# Altium PCB Copy of gimbalPCB.PcbDoc
Units mil, origin at the board's own origin, x right, y up, seen from the top; angles counter-clockwise.
Board outline 6000 x 4000 mil, 2 copper layers (Top Layer, Bottom Layer); 79 components, 41 nets, 0 pads, 0 vias.
Unrouted connection lines stored in the file: 158.
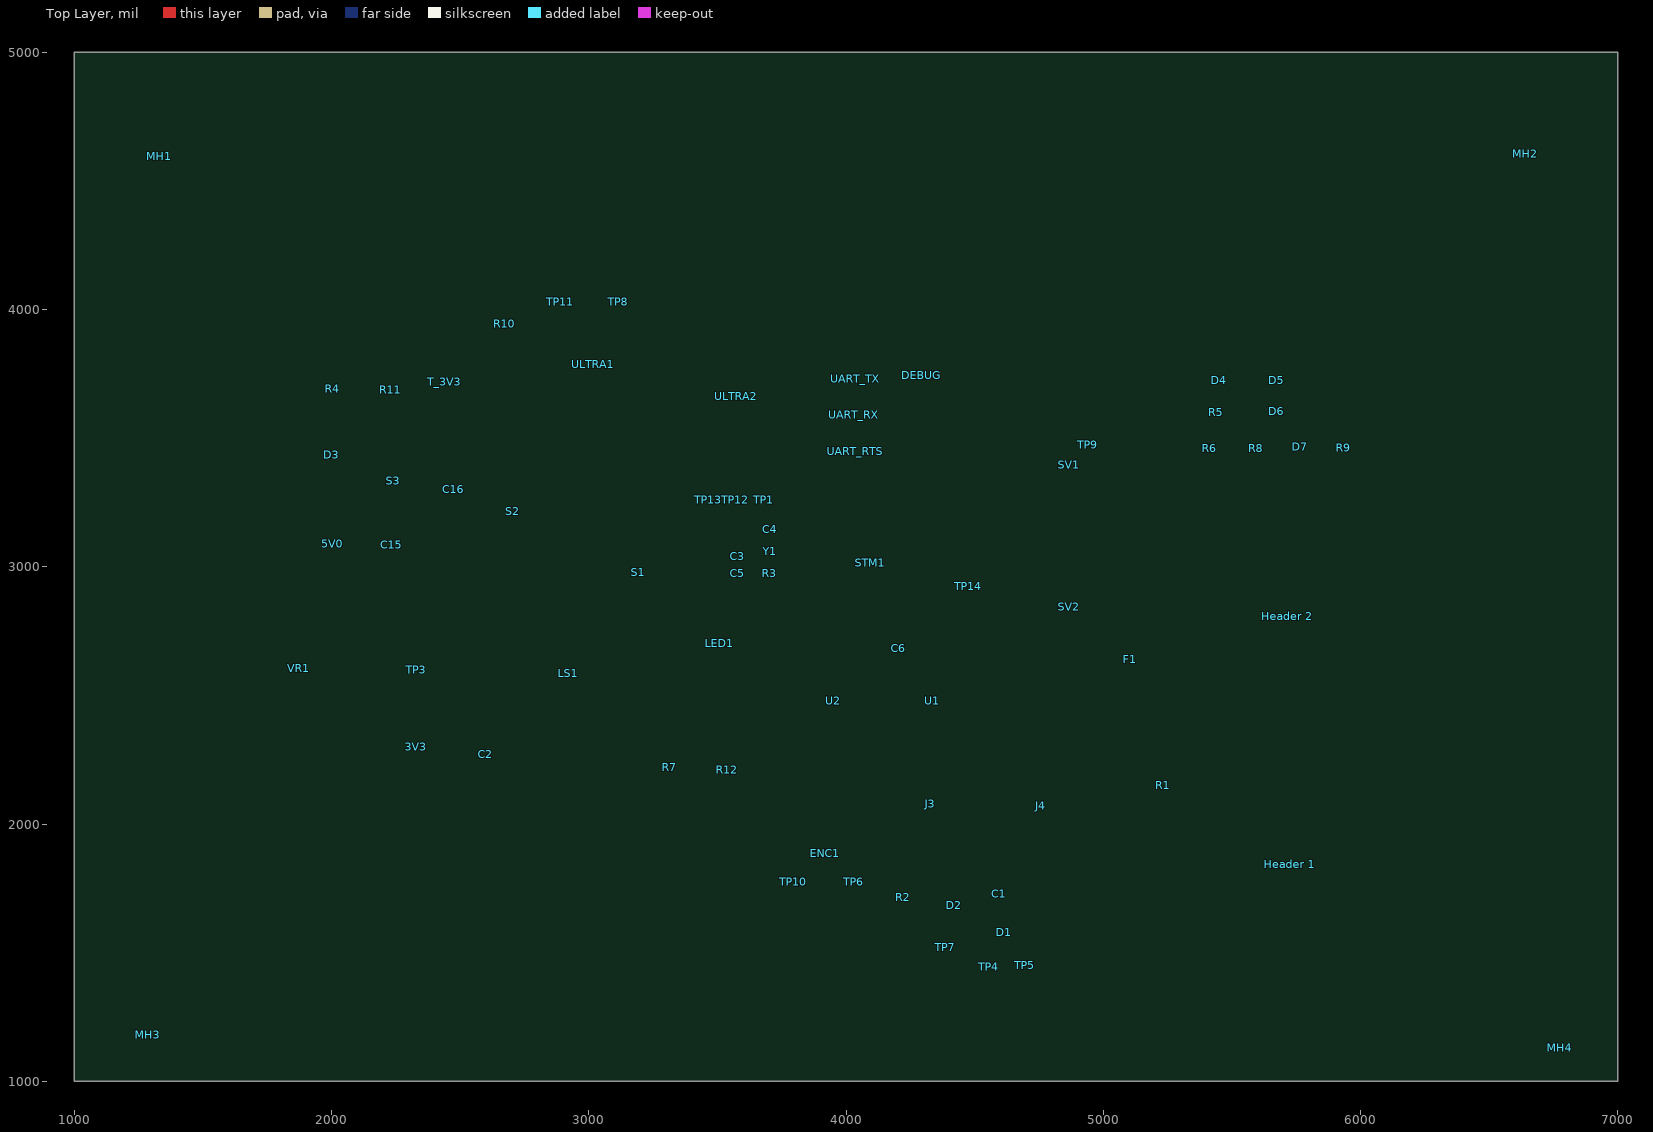
[diagram p0: Top Layer view]
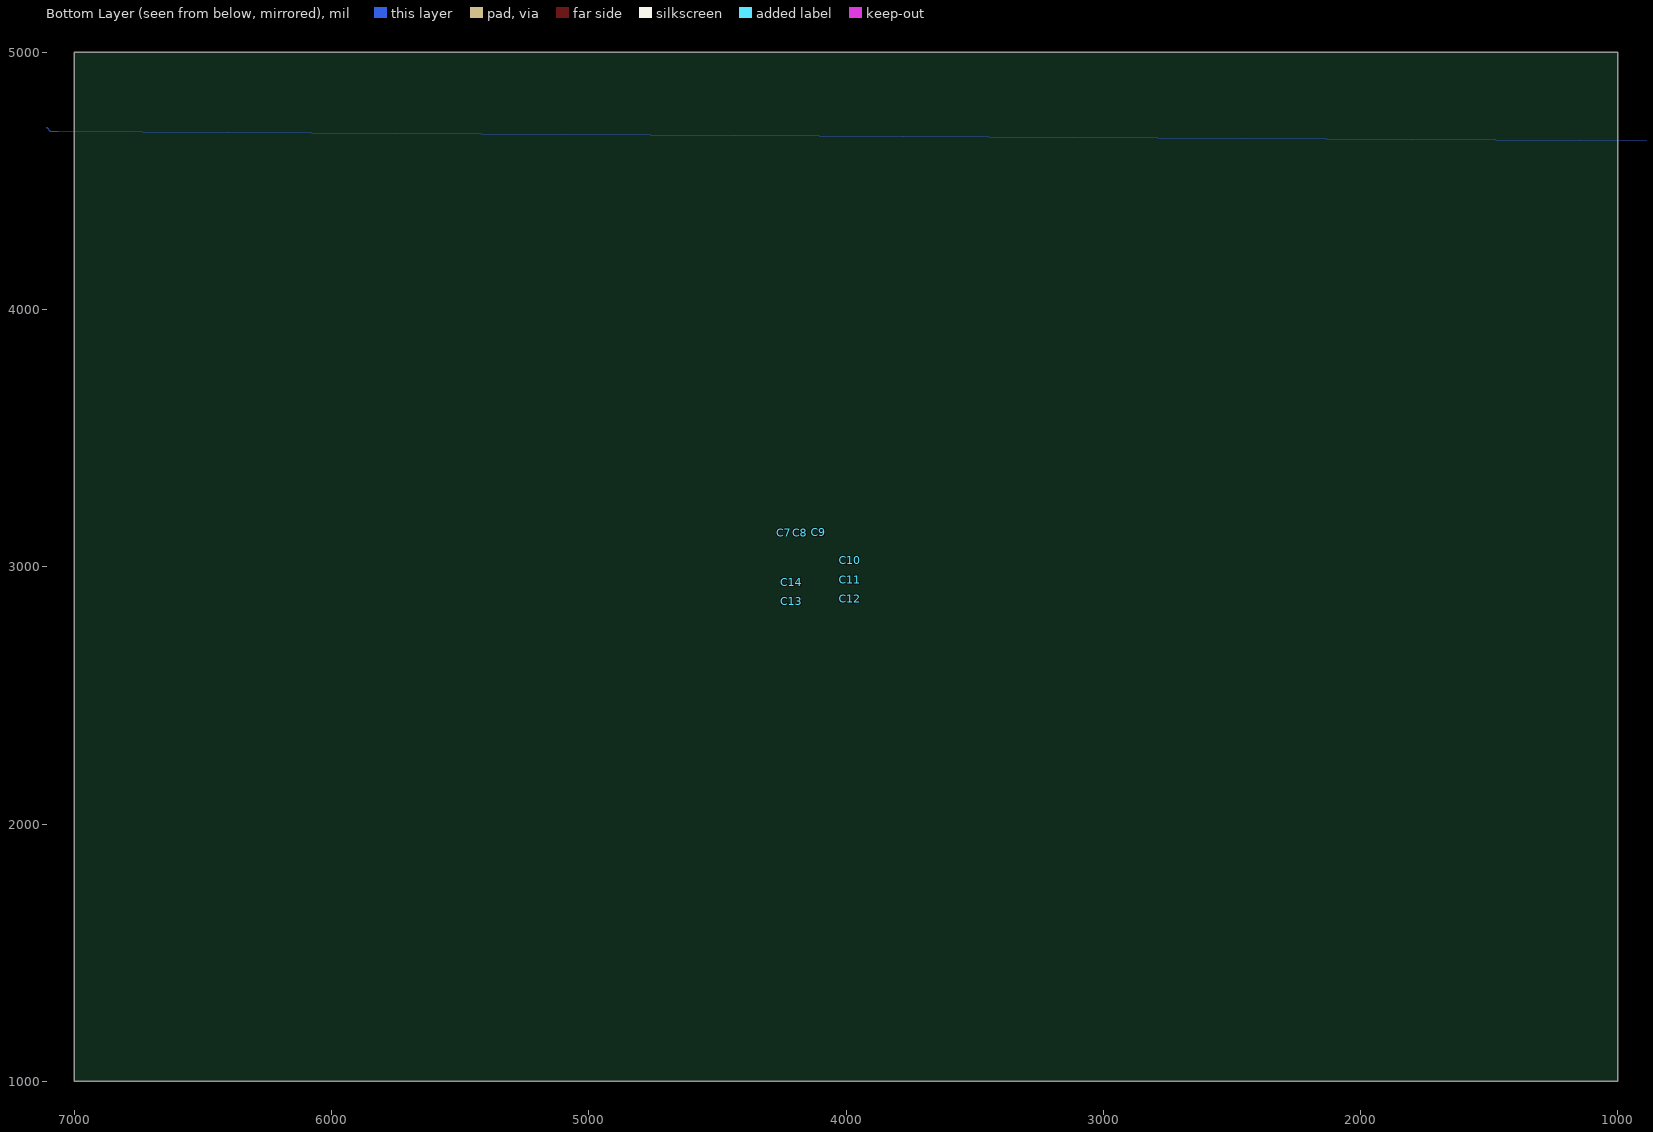
[diagram p1: Bottom Layer view, seen from below]

## Layer stack, top to bottom
Top Solder: solder mask 0.4, Solder Resist, Dk 3.5
Top Layer: signal copper 1.4
Dielectric 1: dielectric 12.6, FR-4, Dk 4.8
Bottom Layer: signal copper 1.4
Bottom Solder: solder mask 0.4, Solder Resist, Dk 3.5

## Board outline
1000,1000 7000,1000 7000,5000 1000,5000

## Design rules (kind name [scope] priority, off if disabled: settings)
BoardOutlineClearance [All] p1: gap=10 ignorepadtopadclearanceinfootprint=FALSE except(0: Arc-SplitContinuation Track-SplitContinuation SMDPad-SplitContinuation THPad-SplitContinuation Via-SplitContinuation Fill-SplitContinuation Poly-SplitContinuation Region-SplitContinuation Text-SplitContinuation)
PolygonConnect [All] p1: connectstyle=Relief reliefconductorwidth=10 reliefentries=4 polygonreliefangle="90 Angle" airgapwidth=10
RoomDefinition Support [InComponentClass('Support')] p1: confinementstyle=ConfineIn formatcopy=TRUE lockcomponents=FALSE outline 0,0 2000,0 2000,1000 0,1000
RoomDefinition POWER [InComponentClass('POWER')] p2: confinementstyle=ConfineIn formatcopy=TRUE lockcomponents=FALSE outline 0,0 2000,0 2000,1000 0,1000
RoomDefinition MCU [InComponentClass('MCU')] p3: confinementstyle=ConfineIn formatcopy=TRUE lockcomponents=FALSE outline 0,0 2000,0 2000,1000 0,1000
RoomDefinition Connectors [InComponentClass('Connectors')] p4: confinementstyle=ConfineIn formatcopy=TRUE lockcomponents=FALSE outline 0,0 2000,0 2000,1000 0,1000
RoomDefinition CAN [InComponentClass('CAN')] p5: confinementstyle=ConfineIn formatcopy=TRUE lockcomponents=FALSE outline 0,0 2000,0 2000,1000 0,1000
RoutingVias [All] p1: holewidth=28 width=50 viastyle="Through Hole" minholewidth=28 minwidth=50 maxholewidth=28 maxwidth=50
SolderMaskExpansion [All] p1: expansion=4
Width "3V3 width" [InNet('+3V3')] p1: maxlimit=20 minlimit=15 preferedwidth=20 minimp=50.000000 maximp=50.000000 favimp=50.000000
Width [All] p2: maxlimit=10 minlimit=6 preferedwidth=10 minimp=50.000000 maximp=50.000000 favimp=50.000000
29 further rules are at their usual default settings.

## Classes and differential pairs
component class Support: D4 D5 D6 D7 MH1 MH2 MH3 MH4 R5 R6 R8 R9 R10 R11 S2 S3 TP8 TP9 TP10 TP11 TP12 TP13 TP14 UART_RTS UART_RX UART_TX
component class POWER: C15 C16 D3 R4 T_3V3 TP1 TP3 VR1
component class MCU: C3 C4 C5 C6 C7 C8 C9 C10 C11 C12 C13 C14 R3 S1 STM1 Y1
component class Connectors: 3V3 5V0 DEBUG ENC1 F1 J3 J4 LED1 LS1 R7 R12 SV1 SV2 ULTRA1 ULTRA2
component class CAN: C1 C2 D1 D2 "Header 1" "Header 2" R1 R2 TP4 TP5 TP6 TP7 U1 U2

## Components (designator, comment, footprint, x,y, rotation, side; value= is the part's Value field where it differs from the comment)
3V3 "" JST-B2B-PHSK 2330,2300 r90 top
5V0 "" JST-B2B-PHSK 2005,3089.37 r90 top
C1 "" CAPC0603(1608)55_N 4595,1728.5 r90 top
C2 "" CAPC0603(1608)55_N 2600,2271.5 r270 top
C3 "" CAPC0603(1608)55_N 3580,3040 r0 top locked
C4 "" CAPC0603(1608)55_N 3705,3145 r0 top locked
C5 "" CAPC0603(1608)55_N 3580,2975 r0 top locked
C6 "" CAPC0603(1608)55_N 4205,2683.5 r90 top
C7 "" CAPC0603(1608)55_N 4240,3131.5 r90 bottom
C8 "" CAPC0603(1608)55_N 4177.5,3131.5 r90 bottom
C9 "" CAPC0603(1608)55_N 4105,3135 r90 bottom
C10 "" CAPC0603(1608)55_N 3983.5,3025 r180 bottom
C11 "" CAPC0603(1608)55_N 3983.5,2950 r180 bottom
C12 "" CAPC0603(1608)55_N 3983.5,2875 r180 bottom
C13 "" CAPC0603(1608)55_N 4211.5,2865 r0 bottom
C14 "" CAPC0603(1608)55_N 4211.5,2940 r0 bottom
C15 "" CAPC0603(1608)55_N 2235,3086.5 r90 top
C16 "" CAPC0603(1608)55_N 2475,3301.5 r270 top
D1 "" NXP-SOT323-3 4615,1578.58 r90 top
D2 "" NXP-SOT323-3 4420,1685 r0 top
D3 "" LED_0805_LINE 2000,3436.34 r270 top
D4 "" LED_0805_LINE 5451.34,3725 r0 top
D5 "" LED_0805_LINE 5675,3725 r0 top
D6 "" LED_0805_LINE 5673.66,3605 r0 top
D7 "" LED_0805_LINE 5765,3466.34 r90 top
DEBUG "" HEADER_2X4 4295,3745 r270 top
ENC1 "" JST-B3B-SM4-TB 3918.54,1886.53 r0 top
F1 "" FUSE 5105,2640 r270 top locked
"Header 1" "" OSTYK51102030 5725,1842.68 r90 top
"Header 2" "" OSTYK51102030 5715,2807.68 r270 top
J3 "" JST-B3B-SM4-TB 4327.99,2078.74 r270 top locked
J4 "" JST-B3B-SM4-TB 4757.99,2070 r270 top locked
LED1 "" JST-B3B-SM4-TB 3508.74,2702.01 r180 top
LS1 "" JST-B2B-SM4-TB 2920.63,2587.01 r180 top
MH1 "" MOUNTING_HOLE 1330,4595 r0 top
MH2 "" MOUNTING_HOLE 6640,4605 r0 top
MH3 "" MOUNTING_HOLE 1285,1180 r0 top
MH4 "" MOUNTING_HOLE 6775,1130 r0 top
R1 "" RESC0603(1608)_N 5233.5,2150 r0 top
R2 "" RESC0603(1608)_N 4223.5,1715 r0 top
R3 "" RESC0603(1608)_N 3703.5,2975 r180 top locked
R4 "" RESC0603(1608)_N 2005,3691.5 r90 top
R5 "" RESC0603(1608)_N 5440,3600 r0 top
R6 "" RESC0603(1608)_N 5415,3461.5 r90 top
R7 "" RESC0603(1608)_N 3315,2220 r180 top
R8 "" RESC0603(1608)_N 5595,3461.5 r90 top
R9 "" RESC0603(1608)_N 5935,3463.5 r90 top
R10 "" RESC0603(1608)_N 2673.5,3945 r0 top
R11 "" RESC0603(1608)_N 2230,3688.5 r90 top
R12 "" RESC0603(1608)_N 3538.5,2210 r180 top
S1 "" PTS830GM140 3192.48,2978.98 r90 top
S2 "" B3U-1100P 2705,3215 r270 top
S3 "" B3U-1100P 2240,3335 r270 top
STM1 "" STM-LQFP64_L 4095,3015 r0 top locked
SV1 "" JST-B3B-SM4-TB 4867.01,3396.77 r90 top
SV2 "" JST-B3B-SM4-TB 4867.01,2845 r90 top
T_3V3 "" TESTPOINT 2440,3720 r90 top
TP1 "" TESTPOINT 3680,3260 r0 top
TP3 "" TESTPOINT_LOOP 2330,2600 r0 top
TP4 "" TESTPOINT 4555,1445 r90 top
TP5 "" TESTPOINT 4695,1450 r90 top
TP6 "" TESTPOINT 4030,1775 r90 top
TP7 "" TESTPOINT 4385,1520 r90 top
TP8 "" TESTPOINT 3115,4030 r90 top
TP9 "" TESTPOINT 4940,3475 r90 top
TP10 "" TESTPOINT 3795,1775 r90 top
TP11 "" TESTPOINT 2890,4030 r90 top
TP12 "" TESTPOINT 3570,3260 r90 top
TP13 "" TESTPOINT 3465,3260 r90 top
TP14 "" TESTPOINT 4475,2925 r90 top
U1 "" LT-S8_N 4335,2480 r0 top
U2 "" LT-S8_N 3950,2480 r0 top
UART_RTS "" TESTPOINT 4035,3450 r90 top
UART_RX "" TESTPOINT 4030,3590 r90 top
UART_TX "" TESTPOINT 4035,3730 r90 top
ULTRA1 "" JST-B4B-SM4-TB 3016.89,3787.01 r180 top
ULTRA2 "" JST-B4B-SM4-TB 3573.11,3662.01 r180 top
VR1 "" VOLTAGE_REGULATOR 1872.17,2605 r270 top
Y1 "" AVX-CX2520DB32000D0GEJZ1-4_V 3705,3060 r90 top locked

## Footprints (in the part's own frame and the unit in brackets; to place one, negate y for a bottom-side part, rotate by r counter-clockwise, add the part's x,y. Pads: shape width x height; smd on the part's side, far side on the other; paste and mask are expansions set on the pad)
AVX-CX2520DB32000D0GEJZ1-4_V [mil] "Hand Drawn, 4-Leads,Body 2.5x2mm"
B3U-1100P [mil] "TACTILE SWITCH GREY"
CAPC0603(1608)55_N [mil] "Chip Capacitor, Body 1.6x0.8mm, Height 0.55mm, IPC Medium Density"
FUSE [mil] "FUSE HOLDER RADIAL 250V 6.3A PCB"
HEADER_2X4 [mil]
JST-B2B-PHSK [mil]
JST-B2B-SM4-TB [mil]
JST-B3B-SM4-TB [mil]
JST-B4B-SM4-TB [mil]
LED_0805_LINE [mil] "SMD, 2-Leads, Body 2x1.25mm"
LT-S8_N [mil] "SOP, 8-Leads, Body 4.9x3.9mm, Pitch 1.27mm, IPC Medium Density"
MOUNTING_HOLE [mil]
NXP-SOT323-3 [mil] "SOT23, 3-Leads, Body 2.2x1.35mm, Pitch 0.65mm"
OSTYK51102030 [mil] "Connector; Header; 2 Position"
PTS830GM140 [mil] "PWR TACTILE SWITCH (RED)"
RESC0603(1608)_N [mil] "Chip Resistor, Body 1.6x0.8mm, IPC Medium Density"
STM-LQFP64_L [mil] "QFP, 64-Leads, Body 10x10mm, Pitch 0.5mm, IPC High Density"
TESTPOINT [mil]
TESTPOINT_LOOP [mil]
VOLTAGE_REGULATOR [mil] "DPAK, 3-Leads, Body 6.095x6.54mm, Pitch 4.57mm"

## Part data
3V3 5V0 LS1: library part CON_2M
C1 C2 C5 C8 C9 C10 C11 C13: library part CAP_0.1uF_16V_0603, "CAP CER 0.1UF 16V X7R 0603"
C3 C4: library part CAP_15pF_0603, "CAP CER 15PF 250V NPO 0603"
C6 C12: library part CAP_4.7uF_0603, "CAP CER 4.7UF 6.3V X5R 0603"
C7: library part CAP_1uF_16V_0603, "CAP CER 1UF 16V Y5V 0603"
C14: library part CAP_10nF_0603, "CAP CER 10000PF 16V X7R 0603"
C15 C16: library part CAP_10uF_0603, "CAP CER 10UF 10V X5R 0603"
D1 D2: library part TVS_DIODE_CAN, "TVS DIODE 24V 41V SOT323-3"
D3 D5 D6 D7: library part DIO_LED_G, "LED GREEN DIFFUSED 0805 SMD"
D4: library part DIO_LED_Y, "LED YELLOW DIFFUSED 0805 SMD"
DEBUG: library part "HEADER 4X2", "Header, 4-Pin Dual row"
ENC1 J3 J4 LED1 SV1 SV2: library part CON_3M
F1: library part FUSE-5A, "FUSE HOLDER RADIAL 250V 6.3A PCB"
"Header 1" "Header 2": library part TERMINAL_2, "Header, 2-Pin"
MH1 MH2 MH3 MH4: library part MOUNTING_HOLES, "6cm x 6cm"
R1 R2: library part RES_120R_0603, "RES SMD 120 OHM 5% 1/10W 0603"
R3: library part RES_0R_0603, "RES SMD 0 OHM JUMPER 1/10W 0603"
R4 R5 R6 R8 R9: library part RES_100R_0603, "RES SMD 100 OHM 1% 1/10W 0603"
R7 R10 R11: library part RES_10K_0603, "RES SMD 10K OHM 5% 1/10W 0603"
R12: library part RES_470R_0603, "RES SMD 470 OHM 1% 1/10W 0603"
S1: library part SW_PWR, "Power Switch (Red)"
S2 S3: library part SW_TACTILE, "Tactile Switch (Grey)"
STM1: library part MCU_STM32F446RET6, "ARM Cortex-M4 32-bit MCU+FPU, 512 KB Flash, 128 KB Internal RAM, 50 I/Os, 64-Pin LQFP, -40 to 85 degC, Tray"
T_3V3 TP1: library part *, "TESTPOINT_SMD"
TP3: library part TESTPOINT_LOOP, "Loop testpoint through-hole pad"
TP4 TP5 TP6 TP7 TP8 TP9 TP10 TP11 TP12 TP13 TP14: library part TESTPOINT_SMD, "TESTPOINT_SMD"
U1 U2: library part LTC2875, "IC TXRX CAN 4MBPS 8SO"
UART_RTS UART_RX UART_TX: library part TESTPOINT
ULTRA1 ULTRA2: library part CON_4M_PH_TOP_SMT, "CONN HEADER PH TOP 4POS 2MM SMD"
VR1: library part 5V0_3V3_LDO, "IC REG LINEAR 3.3V 1A DPAK"
Y1: library part CRYSTAL_32MHZ, "CRYSTAL 32MHZ 8PF SMD"

## Nets (pads, with @x,y where several pads share a name; then routed paths per layer and width w, separated by ;. In a path a pad name is that pad's centre, name@x,y a point inside that pad or via, vN(x,y) a via of type N, cw(c..) or ccw(c..) an arc to the next point about the centre after c; other vN are vias at no path point)
+3V3: 
+5V0: 
GND: 
NetC3_2: 
NetC4_2: 
NetC5_2: 
NetC6_2: 
NetD1_1: 
NetD1_2: 
NetD2_1: 
NetD2_2: 
NetD3_1: 
NetD4_1: 
NetD5_1: 
NetD6_1: 
NetD7_1: 
NetDEBUG_2: 
NetDEBUG_3: 
NetDEBUG_4: 
NetDEBUG_6: 
NetDEBUG_7: 
NetENC1_2: 
NetF1_1: 
"NetHeader 1_2": 
"NetHeader 2_2": 
NetLED1_2: 
NetLS1_1: 
NetR3_1: 
NetR10_2: 
NetR11_1: 
NetR12_1: 
NetSTM1_33: 
NetSTM1_34: 
NetSTM1_35: 
NetSTM1_36: 
NetSTM1_44: 
NetSTM1_45: 
NetSTM1_58: 
NetSTM1_59: 
NetSTM1_61: 
NetSTM1_62: 

## Polygon pours and split planes (outlines as drawn)
GND on Bottom Layer "Bottom Layer-No Net" (solid, shelved, pour order 0): 157.82,4653.07 157.82,218.07 37.82,98.07 7467.82,98.07 7467.82,4348.07 7107.82,4708.07 7092.82,4693.07 7062.82,4693.07